# Altium PCB hat.PcbDoc
Units mil, origin at the board's own origin, x right, y up, seen from the top; angles counter-clockwise.
Board outline 2209.13 x 2563.46 mil, 2 copper layers (Top Layer, Bottom Layer); 12 components, 26 nets, 125 pads, 34 vias.
Unrouted connection lines stored in the file: 3.
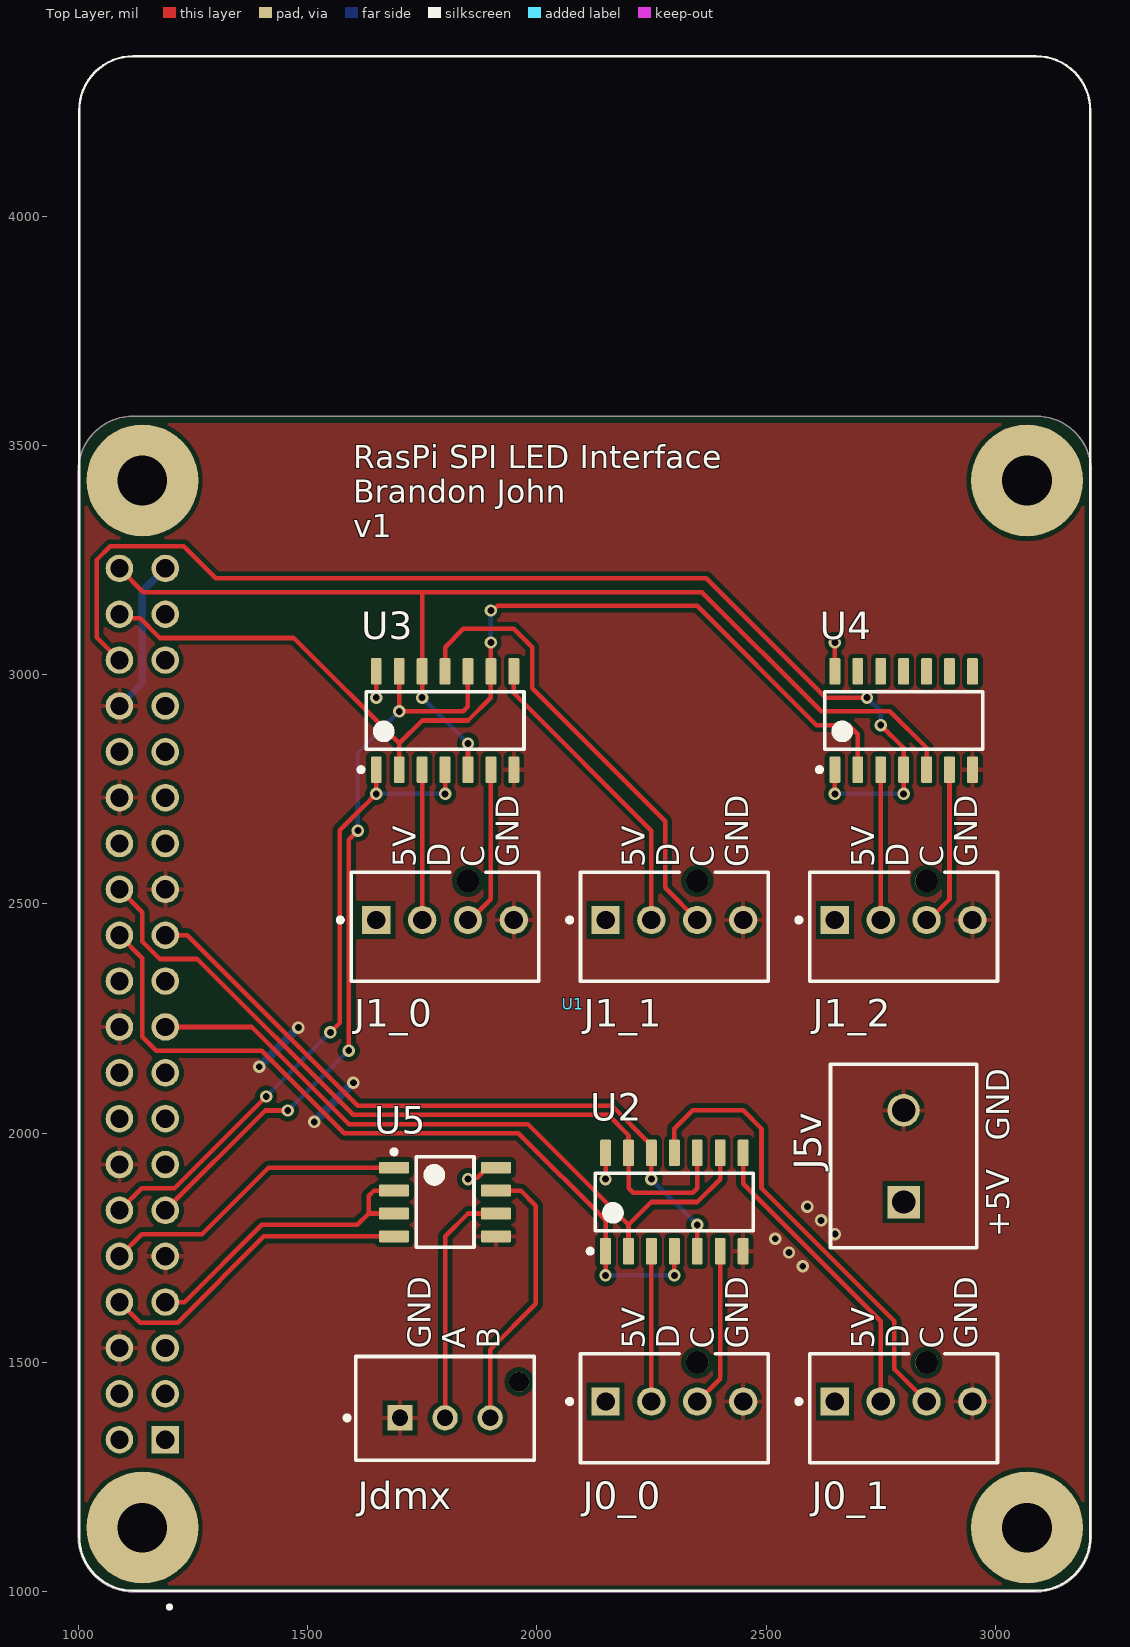
[diagram p0: Top Layer view]
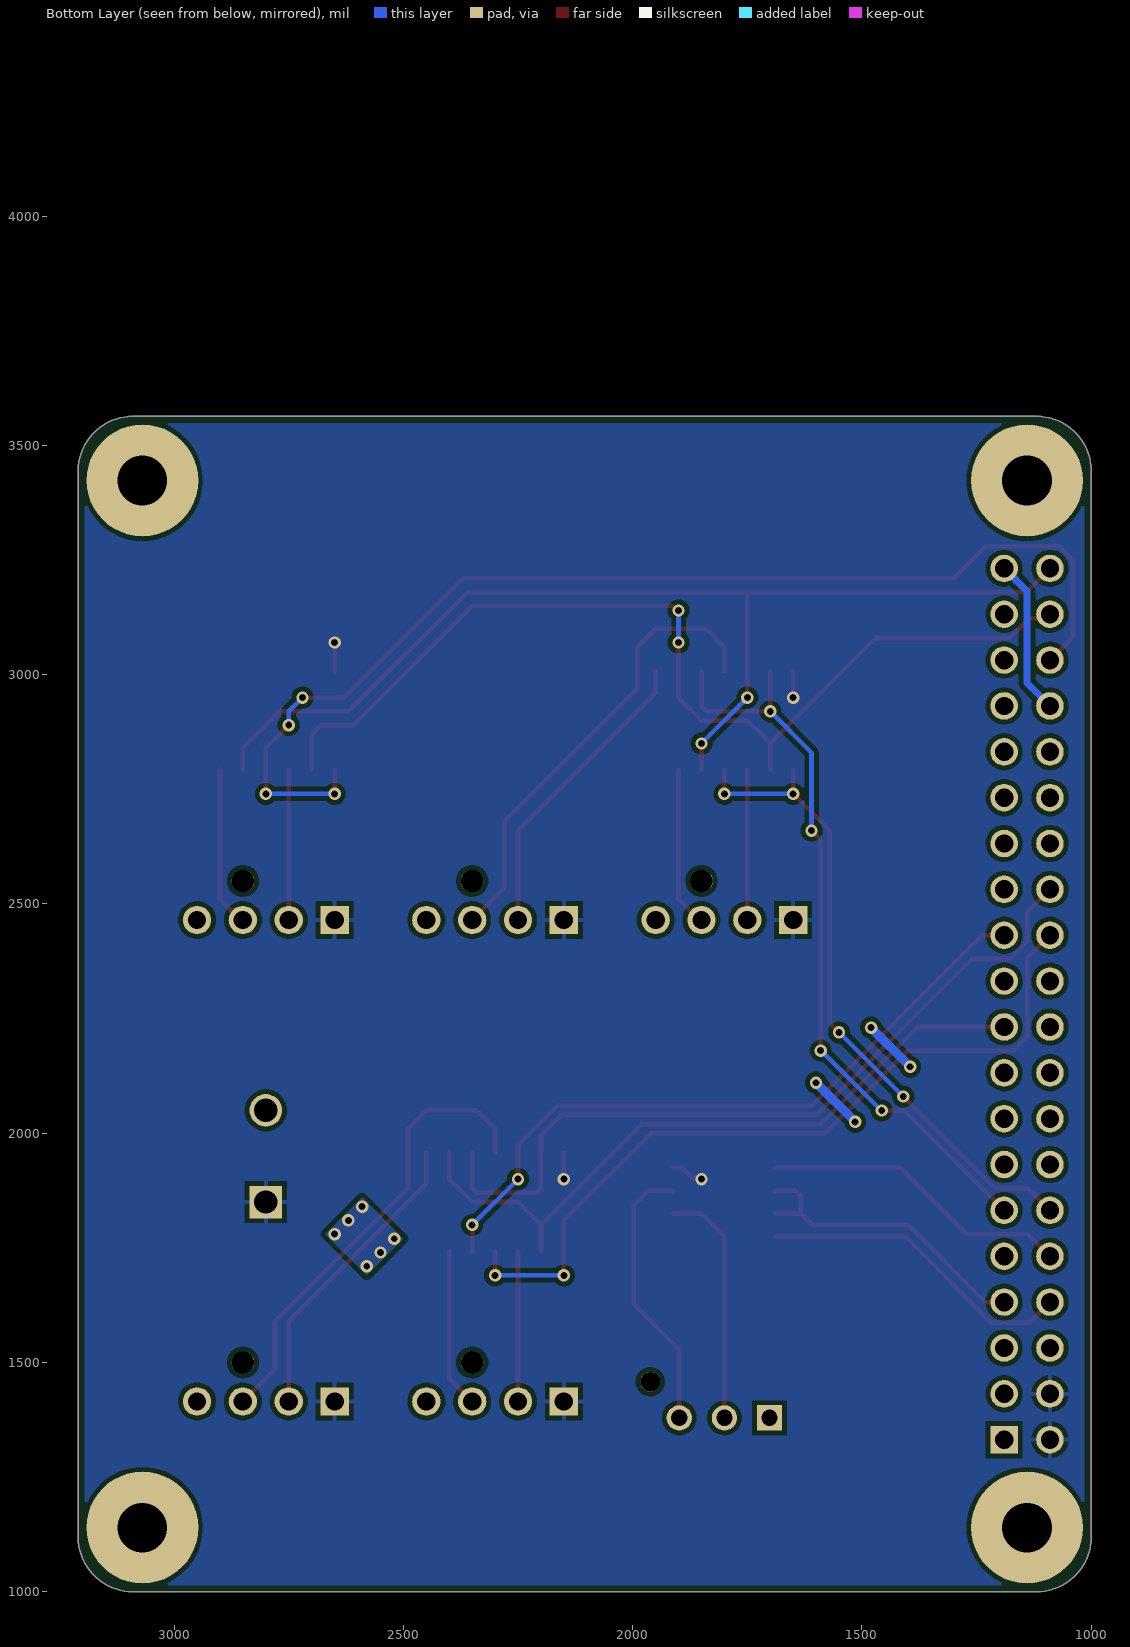
[diagram p1: Bottom Layer view, seen from below]
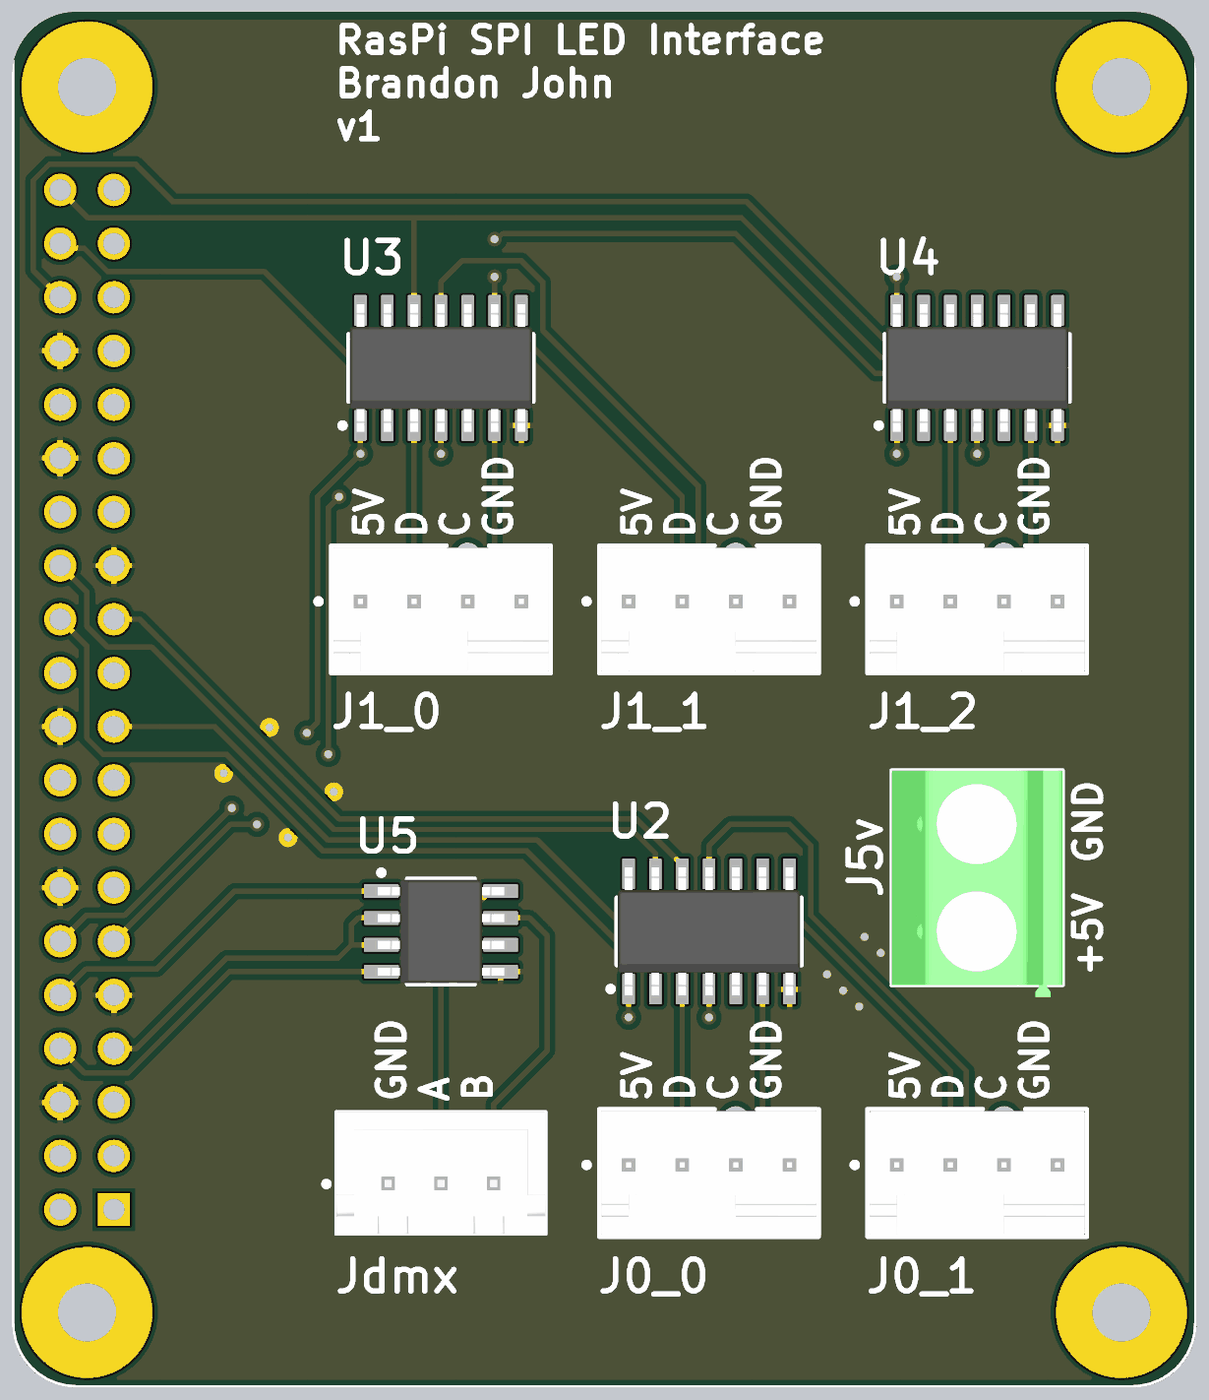
[diagram p2: 3D render of the assembled board from above, using the file's embedded part models]

## Layer stack, top to bottom
Top Solder: solder mask 0.4, Solder Resist, Dk 3.5
Top Layer: signal copper 1.4
Dielectric 1: dielectric 12.6, FR-4, Dk 4.8
Bottom Layer: signal copper 1.4
Bottom Solder: solder mask 0.4, Solder Resist, Dk 3.5

## Board outline
1000,1120 1000,3443.46 cw(c1120,3443.46) 1120,3563.46 3089.13,3563.46 cw(c3089.13,3443.46) 3209.13,3443.46 3209.13,1120 cw(c3089.13,1120) 3089.13,1000 1120,1000 cw(c1120,1120)

## Design rules (kind name [scope] priority, off if disabled: settings)
Clearance [All] p1: gap=10 ignorepadtopadclearanceinfootprint=FALSE except(0: Arc-Hole Track-Hole SMDPad-Hole THPad-Hole Via-Hole Fill-Hole Poly-Hole Region-Hole Text-Hole)
PolygonConnect [All] p1: thpad.connectstyle=Relief thpad.reliefconductorwidth=10 thpad.reliefentries=4 thpad.polygonreliefangle="90 Angle" thpad.airgapwidth=10 smdpad.connectstyle=Relief smdpad.reliefconductorwidth=10 smdpad.reliefentries=4 smdpad.polygonreliefangle="90 Angle" smdpad.airgapwidth=10 via.connectstyle=Direct via.reliefconductorwidth=10 via.reliefentries=4 via.polygonreliefangle="90 Angle" via.airgapwidth=10
RoutingVias [All] p1: holewidth=15 width=27 viastyle="Through Hole" minholewidth=10 minwidth=22 maxholewidth=50 maxwidth=62
SolderMaskExpansion [All] p1: expansion=4 istentingtop=FALSE
Width [All] p1: maxlimit=100 minlimit=6 preferedwidth=10 minimp=50.000000 maximp=50.000000 favimp=50.000000
30 further rules are at their usual default settings.

## Components (designator, comment, footprint, x,y, rotation, side; value= is the part's Value field where it differs from the comment)
J0_0 "47053-1000" FP-47053-1000-MFG 2300,1400 r180 top
J0_1 "47053-1000" FP-47053-1000-MFG 2800,1400 r180 top
J1_0 "47053-1000" FP-47053-1000-MFG 1800,2450 r180 top
J1_1 "47053-1000" FP-47053-1000-MFG 2300,2450 r180 top
J1_2 "47053-1000" FP-47053-1000-MFG 2800,2450 r180 top
J5v "1729128" PHOE-1729128-2_V 2800,1950 r90 top
Jdmx "B3B-XH-AM(LF)(SN)" FP-B3B-XH-AM_LF_SN-MFG 1800,1400 r0 top
U1 "RASPBERRY_PI_3_MODEL_B+" MODULE_RASPBERRY_PI_3_MODEL_B+ 2104.57,2675.43 r90 top locked
U2 "SN74AHCT125DR" D0014A_N 2300,1850 r90 top
U3 "SN74AHCT125DR" D0014A_N 1800,2900 r90 top
U4 "SN74AHCT125DR" D0014A_N 2800,2900 r90 top
U5 "SN75176BDR" D0008A_M 1800,1850 r0 top

## Footprints (in the part's own frame and the unit in brackets; to place one, negate y for a bottom-side part, rotate by r counter-clockwise, add the part's x,y. Pads: shape width x height; smd on the part's side, far side on the other; paste and mask are expansions set on the pad)
D0008A_M [mm] "SOIC, 8-Leads, Body 5x4mm, Pitch 1.27mm, IPC Low Density"
  rrect15% 1.65x0.65 smd: 1(-2.825,1.905) 2(-2.825,0.635) 3(-2.825,-0.635) 4(-2.825,-1.905) 5(2.825,-1.905) 6(2.825,-0.635) 7(2.825,0.635) 8(2.825,1.905)
  silkscreen extent -2.95,-2.5 1.6,2.9, body extent -3,-2.45 3,2.45, height 1.63
D0014A_N [mm] "SOIC, 14-Leads, Body 8.75x4mm, Pitch 1.27mm, IPC Medium Density"
  rrect17% 1.45x0.6 smd: 1(-2.725,3.81) 2(-2.725,2.54) 3(-2.725,1.27) 4(-2.725,0) 5(-2.725,-1.27) 6(-2.725,-2.54) 7(-2.725,-3.81) 8(2.725,-3.81) 9(2.725,-2.54) 10(2.725,-1.27) 11(2.725,0) 12(2.725,1.27) 13(2.725,2.54) 14(2.725,3.81)
  silkscreen extent -2.85,-4.38 1.6,4.78, body extent -3.02,-4.32 3.02,4.32, height 1.59
FP-47053-1000-MFG [mm]
  rect 1.57x1.57 hole 1.02 paste-1000 mask+0: 1(3.81,-0.38)
  round 1.57 hole 1.02 paste-1000 mask+0: 2(1.27,-0.38) 3(-1.27,-0.38) 4(-3.81,-0.38)
  round 1.25 hole 1.25 unplated paste-1000 mask+0: ""(-1.27,-2.54)
  silkscreen extent -5.2,-3.02 5.92,3.02, body extent -5.3,-3.26 5.3,3.12, height 0.25
FP-B3B-XH-AM_LF_SN-MFG [mm]
  rect 1.4x1.4 hole 0.9 paste-1000 mask+0: 1(-2.5,-0.525)
  round 1.4 hole 0.9 paste-1000 mask+0: 2(0,-0.525) 3(2.5,-0.525)
  round 1.1 hole 1.1 unplated paste-1000 mask+0: ""(4.1,1.475)
  silkscreen extent -5.55,-2.88 4.95,2.88, body extent -5.05,-2.98 5.05,2.98, height 0.25
MODULE_RASPBERRY_PI_3_MODEL_B+ [mil]
  rect 60x60 hole 40: 1(-1343.7,914.57)
  round 60 hole 40: 2(-1343.7,1014.57) 3(-1243.7,914.57) 4(-1243.7,1014.57) 5(-1143.7,914.57) 6(-1143.7,1014.57) 7(-1043.7,914.57) 8(-1043.7,1014.57) 9(-943.7,914.57) 10(-943.7,1014.57) 11(-843.7,914.57) 12(-843.7,1014.57) 13(-743.7,914.57) 14(-743.7,1014.57) 15(-643.7,914.57) 16(-643.7,1014.57) 17(-543.7,914.57) 18(-543.7,1014.57) 19(-443.7,914.57) 20(-443.7,1014.57) 21(-343.7,914.57) 22(-343.7,1014.57) 23(-243.7,914.57) 24(-243.7,1014.57) 25(-143.7,914.57) 26(-143.7,1014.57) 27(-43.7,914.57) 28(-43.7,1014.57) 29(56.3,914.57) 30(56.3,1014.57) 31(156.3,914.57) 32(156.3,1014.57) 33(256.3,914.57) 34(256.3,1014.57) 35(356.3,914.57) 36(356.3,1014.57) 37(456.3,914.57) 38(456.3,1014.57) 39(556.3,914.57) 40(556.3,1014.57)
  round 244.09 hole 108.27: S1(-1535.43,964.57) S2(748.03,964.57) S3(748.03,-964.57) S4(-1535.43,-964.57)
  silkscreen extent -1713,-1102 1673,1102
PHOE-1729128-2_V [mm] "Receptacle, 2-Leads, Body 8.1x10.16mm, Pitch 5.08mm"
  rect 1.8x1.8 hole 1.3: 1(-2.54,0)
  round 1.8 hole 1.3: 2(2.54,0)
  silkscreen extent -5.08,-4.05 5.08,4.05, body extent -5.65,-4.05 5.08,4.05, height 10.01

## Part data
J0_0 J0_1 J1_0 J1_1 J1_2: library part CMP-04776-000290-1, "CONN HEADER VERT 4POS 2.54MM", Current Rating=4A, Housing Color=Beige, Max Operating Temperature=75°C, Min Operating Temperature=0°C, Package Quantity=12000, Voltage Rating=250V, Contact Material=Brass, Contact Plating=Tin, Depth=5.84mm, Gender=Male, Glow Wire Compliant=Non-compliant, Halogen Free="Low Halogen", Housing Material=Nylon, Length=10.2mm, Mount="Through Hole", Number of Circuits=4, Number of Contacts=4, Number of Positions=4, Number of Rows=1, Orientation=Vertical, Packaging=Bulk, Pitch=2.54mm, Radiation Hardening=No, Series=47053, Termination="Through Hole", Voltage Rating (DC)=250V
J5v: library part CMP-2000-05815-1, "PCB Terminal Block, 13.5 A, 400 V, 2-Pin THD, RoHS, Bulk", Current Rating=13500mA, Manufacturer="Phoenix Contact", Package Description="2-Pin Through Hole Device, Body 8.1 x 10.16 mm, Pitch 5.08 mm", Package Reference=1729128-2, Package Version=03/2015, Voltage Rating=400V, Datasheet URL=https://datasheet.ciiva.com/16046/1729128-16046181.pdf, Datasheet Version=12/2013, Manufacturer URL=http://www.phoenixcontact.com/, Mounting Technology=ThroughHole, No. of Positions=2, No. of Rows=1, Orientation=Horizontal, Package URL=https://www.phoenixcontact.com/online/portal/pi/pxc/product_detail_page/!ut/p/b1/3VdJjqNKFDxLH8AFycySyWY2ozFsEPOMMQaDOX1XedGL_1Vdm5YXJleknhSKeBkvI6EA8ncAo3AYoDhBQGco6KN7VURTdemj9us_IEKEZo_YHiPAEWEFmDGOHMORkqKYCORBZxgL7ZoaZYcbFFUZ3fqxSY6GOuxydWUuHqz1ynmMFygu583Bob0Ewr6Sd_l-5m-kAueHiB0jpRwZwe58wwtkpxtMYd_LmGcDRU02dRNEyWt6Y2ti5pSyJ_reIkzIulrqApdnbT11V5jnCKbYNCvhEM1MCpPByat_X379-iThf08CI5GfOPqfBeS3BRoBOdD55AKVv0iLwCMq-2BrzXWSGRH7pUGD9uwXQjiph3xL0DKQwdGa0JImiIOmBNOestqgwTHSSs2oOep-78apyXQBvNi8ZLaFjvjWvcaUEBu0MC6Wbe-d6mB0FAebo2lUWinqYaZs5DAYzV0RP9yitUjnGJ0iI9xhZkT42OCQNUJJhkgWINNQLP2JFP6OpMg3JCVg70jqHT0lvKOnhHf0lPuOnnLf0VPuWx6_dxwUIvwk5WMkT0kLL1mh61l2yZVSzG3pYV_bqo-mj6uMKwKwdnnW8Jh5RTOJzMOA5c-eJDaZQw4mTMPH02PvS_ZAqNVjVTo2WyYLkwH_KU1mmmG5kjRhDqPXLwwVHvVOjCM60-fpXvTDfMGW1PVFVS1r4e4yVDk4ZdNbkUHvqPqQSeian4UD39fNKmachqdJ1NJbyk8rXT9mXTvPk3oE5meulKGgiruPJek-4I9hTT6G8ZLOyRSm2RRVbThERQad5OS28hdt4YW4vG0stgYYzsWsK4_7y6DZMjJSCqri1kyiZR5vD7pwIrNR7QwPHTcLTI5qT7eRlpHrdGiupYlqQDJ7zy_CND8fWWBoLRXxk1RVcXiBQwbTD4Xi7KL-FuO94t9xaqweXzH, Packing=Bulk, PartNumber=1729128, Pitch=5.08mm, RoHS=TRUE
Jdmx: library part CMP-17438-000009-1, "CONN HEADER VERT 3POS 2.5MM", Color=Natural, Contact Resistance=20mR, Housing Color=White, Max Current Rating=3A, Max Operating Temperature=85°C, Max Voltage Rating (AC)=250V, Min Operating Temperature=-25°C, Connector Type="Male Pin", Contact Material=Brass, Contact Plating=Tin, Contact Type="Male Pin", Depth=5.75mm, Fastening Type=Detent, Gender=Male, Housing Material=Polyamide, Lead Free="Lead Free", Length=9.9mm, Mount="Through Hole", Number of Positions=3, Number of Rows=1, Orientation=Straight, Packaging=Bulk, Pitch=0.098inch, Series=XH, Termination=Press-Fit
U1: "BCM2835 Raspberry Pi Model B+ - ARM11, VideoCore MPU Embedded Evaluation Board", Package=None, Availability=Unavailable, MP=RASPBERRY_PI_3_MODEL_B+, Price=None
U2 U3 U4: library part CMP-0440-00325-3, "Quadruple Bus Buffer Gates With 3-State Outputs, D0014A, LARGE T&R", F @ Nom Voltage(Max)(Mhz)=110, Generic Part Number=SN74AHCT125, ICC @ Nom Voltage(Max)(mA)=0.02, Manufacturer="Texas Instruments", Operating Temperature Range(C)="-40 to 125", Rating=Catalog, tpd @ Nom Voltage(Max)(ns)=8.5, Voltage(Nom)(V)=5, Bits(#)=4, Code_JEDEC=MS-012, DatasheetVersion=SCLS264O, Input Type=TTL, Output Type=CMOS, PackageReference=D0014A, PackageVersion=http://www.ti.com/lit/ml/mpds177g/mpds177g.pdf, VCC(Max)(V)=5.5, VCC(Min)(V)=4.5
U5: library part CMP-0310-00160-2, "Differential Bus Transceiver, 1 TX / 1 RX, 5V, 0 to 70 degC, 8-Pin SOIC (D), Green (RoHS & no Sb/Br)", Drivers Per Package=1, Manufacturer="Texas Instruments", Rating=Catalog, Supply Voltage(s)(V)=5, # of TX/RX="1 TX / 1 RX", Code_JEDEC=MS-012AA, ComponentLink1Description=Datasheet, ComponentLink1URL=http://www.ti.com/general/docs/lit/getliterature.tsp?genericPartNumber=SN75176B&fileType=pdf, ComponentLink2Description="Package Specification", ComponentLink2URL=http://www.ti.com/lit/ml/msoi002j/msoi002j.pdf, DatasheetVersion=SLLS101D, Eco-Plan="Green (RoHS & no Sb/Br)", ESD(kV)=2, ICC(Max)(mA)=70, Isolated=No, Mounting Technology="Surface Mount", PackageDescription="8-Pin Plastic Small Outline Integrated Circuit, 4.9 x 3.9 mm, Pitch 1.27 mm Pitch", PackageReference=D0008A, PackageVersion="revM, Jun-2011", PartNumber=SN75176BDR, Receivers Per Package=1, SubFamily=RS-422

## Via types
v1: diameter 27, hole 15, Top Layer to Bottom Layer, tented both sides, 29 vias
v2: diameter 27, hole 15, Top Layer to Bottom Layer, 5 vias

## Nets (pads, with @x,y where several pads share a name; then routed paths per layer and width w, separated by ;. In a path a pad name is that pad's centre, name@x,y a point inside that pad or via, vN(x,y) a via of type N, cw(c..) or ccw(c..) an arc to the next point about the centre after c; other vN are vias at no path point)
5V: J0_0.1 J0_1.1 J1_0.1 J1_1.1 J1_2.1 J5v.1 U1.2 U1.4 U2.14 U3.14 U4.14 U5.8 | length 248.9
  Top Layer w10: v1(1650,2950) U3.14 ; v2(1850,1900) 1853.25,1903.25 1869.79,1903.25 1891.54,1925 U5.8 ; v1(2150,1900) U2.14 ; U4.14 v1(2650,3070)
A: Jdmx.2 U5.6 | length 527.6
  Top Layer w10: Jdmx.2 1800,1775 1850,1825 U5.6
B: Jdmx.3 U5.7 | length 604.4
  Top Layer w10: Jdmx.3 1898.43,1528.43 1998.07,1628.07 1998.07,1841.93 1965,1875 U5.7
C0_0: J0_0.3 U2.6 | length 343.4
  Top Layer w10: J0_0.3 2400,1464.96 ; 2400,1470 U2.6
C0_1: J0_1.3 U2.11 | length 1020
  Top Layer w10: U2.11 2300,2010 2340,2050 2450,2050 2490,2010 2490,1880 2780,1590 2780,1484.96 J0_1.3
C1_0: J1_0.3 U3.6 | length 355.6
  Top Layer w10: J1_0.3@1848.48,2458.48 1900,2510 U3.6
C1_1: J1_1.3 U3.11 | length 1020
  Top Layer w10: U3.11 1800,3060 1840,3100 1950,3100 1990,3060 1990,2970 2280,2680 2280,2534.96 J1_1.3
C1_2: J1_2.3 U4.6 | length 368.1
  Top Layer w10: J1_2.3@2839.6,2449.6 2900,2510 U4.6
D0_0: J0_0.2 U2.3 | length 331.3
  Top Layer w10: J0_0.2@2250,1411.41 U2.3
D0_1: J0_1.2 U2.8 | length 666.6
  Top Layer w10: U2.8 2450,1890 2750,1590 J0_1.2
D1_0: J1_0.2 U3.3 | length 328.2
  Top Layer w10: J1_0.2@1750,2464.53 U3.3
D1_1: J1_1.2 U3.8 | length 668.1
  Top Layer w10: U3.8 1950,2960 2250,2660 J1_1.2@2250,2463.5
D1_2: J1_2.2 U4.3 | length 327.8
  Top Layer w10: J1_2.2 U4.3
Enable: U1.7 U5.2 U5.3 | length 677.5
  Top Layer w10: U1.7 1231.73,1631.73 1400.21,1800.21 1608.47,1800.21 1633.27,1825 ; U5.3 1633.27,1825 ; U5.2 1645,1875 1633.27,1863.27 1633.27,1825
GND: J0_0.4 J0_1.4 J1_0.4 J1_1.4 J1_2.4 J5v.2 Jdmx.1 U1.6 U1.9 U1.14 U1.20 U1.25 U1.30 U1.34 U1.39 U2.7 U3.7 U4.7 U5.5 | length 582.7
  Bottom Layer w16: U1.34 1140,2981.73 1140,3181.73 U1.39
  Bottom Layer w20: v2(1394.85,2144.85) v2(1480.15,2230.15) ; v2(1514.85,2024.85) v2(1600.15,2110.15)
  other v1: 2580,1710 2550,1740 2520,1770 2650,1780 2620,1810 2590,1840
RX: U1.10 U5.1 | length 678.8
  Top Layer w10: U1.10 1138.27,1780 1270,1780 1415,1925 U5.1
SPI0_C\E\0\: U1.24 U2.1 U2.4 | length 1740.8
  Top Layer w10: U1.24 1140,2381.73 1140,2210 1170,2180 1400,2180 1580,2000 1960,2000 2150,1810 U2.1 v1(2150,1690) ; v1(2300,1690) U2.4
  Bottom Layer w10: v1(2150,1690) v1(2300,1690)
SPI0_C\E\1\: U1.26 U2.10 U2.13 | length 1719.5
  Top Layer w10: U1.26 1140,2481.73 1140,2418.09 1178.09,2380 1260,2380 1600,2040 2155.73,2040 2200,1995.73 U2.13 ; U2.13@2200.4,1956.88 2200.4,1879.6 2210,1870 2340,1870 2349.6,1879.6 U2.10@2349.6,1956.88
SPI0_MOSI: U1.19 U2.2 U2.9 | length 1544.8
  Top Layer w10: U1.19 1378.27,2231.73 1590,2020 1980,2020 2200,1800 ; U2.2 2200,1800 ; U2.9 2400,1900 2350,1850 2250,1850 2200,1800
SPI0_SCK: U1.23 U2.5 U2.12 | length 1522.2
  Top Layer w10: U1.23 1237.96,2431.73 ; 1238.12,2431.88 1610,2060 2164.02,2060 2250,1974.02 U2.12 v1(2250,1900) ; U2.5 v1(2350,1800)
  Bottom Layer w10: v1(2250,1900) v1(2350,1800)
SPI1_C\E\0\: U1.12 U3.1 U3.4 | length 1437.9
  Top Layer w10: U1.12 1138.27,1880 1210,1880 v1(1410,2080) ; v1(1550,2220) 1550,2220.3 1570,2240.3 1570,2660.3 1622.82,2713.13 1623.13,2713.13 v1(1650,2740) U3.1 ; v1(1800,2740) U3.4
  Bottom Layer w10: v1(1410,2080) v1(1550,2220) ; v1(1650,2740) v1(1800,2740)
SPI1_C\E\1\: U1.11 U3.10 U3.13 | length 1648.5
  Top Layer w10: U1.11 1407.84,2049.55 v1(1456.91,2049.55) ; v1(1590,2180) 1590,2640 v1(1610,2660) ; U3.13 v1(1700,2920) 1840,2920 1849.6,2929.6 1849.6,3006.88 U3.10
  Bottom Layer w10: v1(1456.91,2049.55) 1458.23,2049.55 1588.68,2180 v1(1590,2180) ; v1(1610,2660) 1610,2830 v1(1700,2920)
SPI1_C\E\2\: U1.36 U4.1 U4.4 | length 2513.9
  Top Layer w10: U1.36 1040,3081.73 1040,3250 1070,3280 1230,3280 1300,3210 2370,3210 2630,2950 v1(2720,2950) ; v1(2650,2740) U4.1 ; v1(2750,2890) 2800,2840 U4.4 v1(2800,2740)
  Bottom Layer w10: v1(2650,2740) v1(2800,2740) ; v1(2720,2950) 2750,2920 v1(2750,2890)
SPI1_MOSI: U1.38 U3.2 U3.9 U4.2 | length 2212.8
  Top Layer w10: U1.38 1098.64,3123.09 1135,3123.09 1178.09,3080 1470,3080 1700,2850 ; U3.2 1700,2850 ; v1(1900,3070) U3.9 1900,2950 1850,2900 1750,2900 1700,2850 ; v1(1900,3140) 1904.36,3140 1914.36,3150 2350,3150 2610,2890 2680,2890 2700,2870 U4.2
  Bottom Layer w10: v1(1900,3070) v1(1900,3140)
SPI1_SCK: U1.40 U3.5 U3.12 U4.5 | length 2396.5
  Top Layer w10: U1.40 1141.73,3180 1750,3180 ; v1(1750,2950) U3.12 ; U3.12@1750,3009.05 1750,3180 ; U3.5 v1(1850,2850) ; U4.5 2850,2840 2770,2920 2620,2920 2360,3180 1750,3180
  Bottom Layer w10: v1(1750,2950) v1(1850,2850)
TX: U1.8 U5.4 | length 695.4
  Top Layer w10: U1.8 1135,1586.73 1216.73,1586.73 1405,1775 U5.4
pads on no net: J0_0. J0_1. J1_0. J1_1. J1_2. Jdmx. U1.1 U1.3 U1.5 U1.13 U1.15 U1.16 U1.17 U1.18 U1.21 U1.22 U1.27 U1.28 U1.29 U1.31 U1.32 U1.33 U1.35 U1.37 U1.S1 U1.S2 U1.S3 U1.S4 U4.8 U4.9 U4.10 U4.11 U4.12 U4.13

## Polygon pours and split planes (outlines as drawn)
5V on Bottom Layer "5V_L02_P002" (solid, pour order 2): 1000,3575 3200,3575 3200,1000 1000,1000
GND on Bottom Layer "GND_L02_P001" (solid, pour order 1): 2500,1770 2590,1860 2670,1780 2580,1690
GND on Top Layer "GND_L01_P000" (solid, remove dead copper, pour order 0): 1000,1000 1000,3575 3200,3575 3200,1000

## Keep-outs
Keep-Out Layer:
  the board outline again, w2

## Silkscreen, mask and mechanical layers (free items; w line width, h text height)
Top Overlay:
  text "RasPi SPI LED Interface / Brandon John / v1" at 1600,3300 h50
  text "5V / D / C / GND" at 1960.96,2580 h50 r90
  text "5V / D / C / GND" at 2460.96,2580 h50 r90
  text "5V / D / C / GND" at 2960.96,2580 h50 r90
  text "GND" at 3029.98,1983.36 h50 r90
  text "+5V" at 3029.98,1773.36 h50 r90
  text "GND / A / B" at 1918.97,1530 h50 r90
  text "5V / D / C / GND" at 2460.96,1530 h50 r90
  text "5V / D / C / GND" at 2960.96,1530 h50 r90